# Altium PCB generic 32u4.PcbDoc
Units mil, origin at the board's own origin, x right, y up, seen from the top; angles counter-clockwise.
Board outline 2780 x 3080 mil, 4 copper layers (Component Side, GND LAYER, PWR LAYER, Bottom Layer), stack 64.6 mil thick; 39 components, 27 nets, 136 pads, 43 vias.
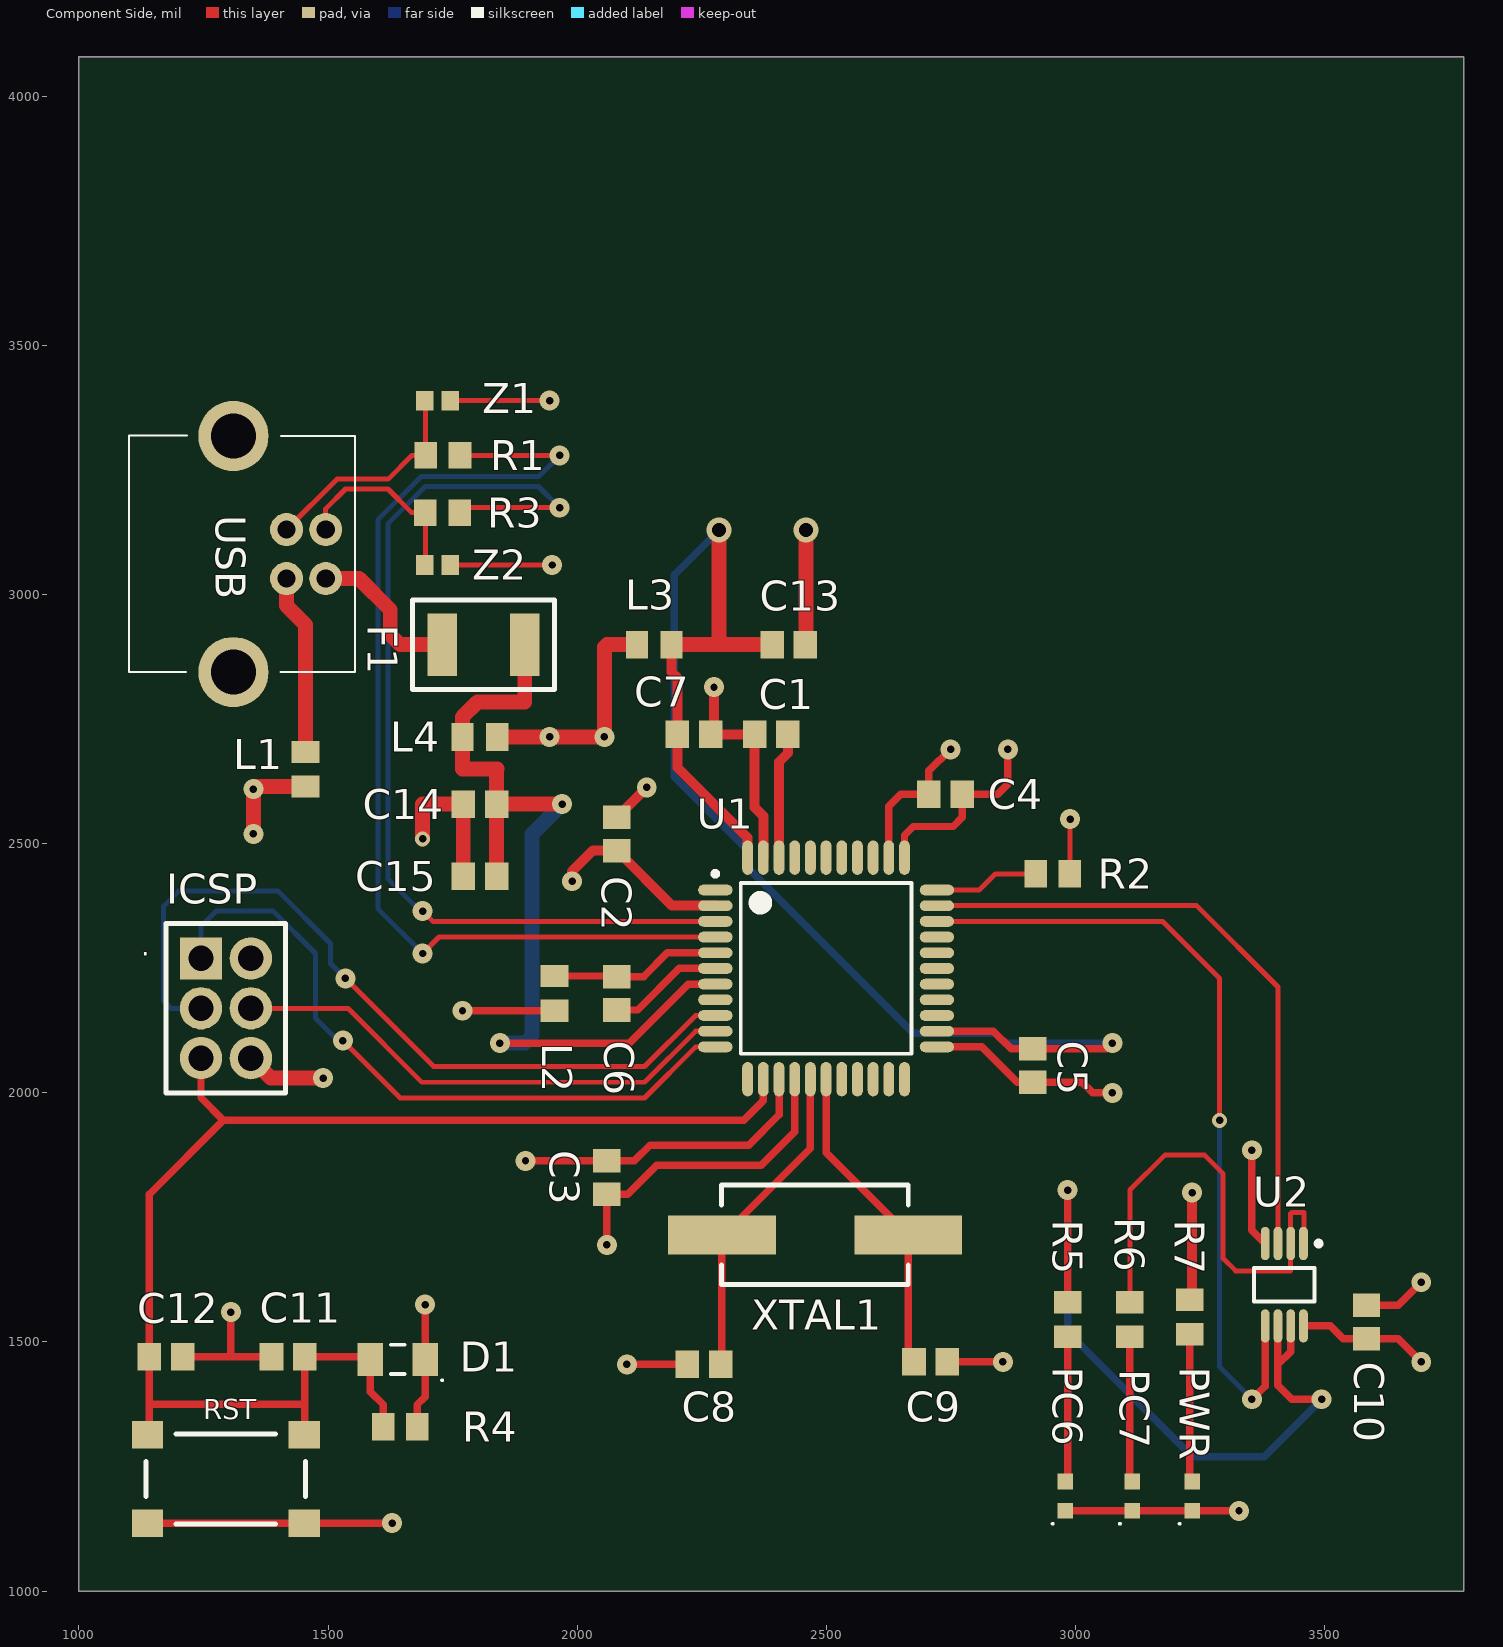
[diagram p0: Component Side view]
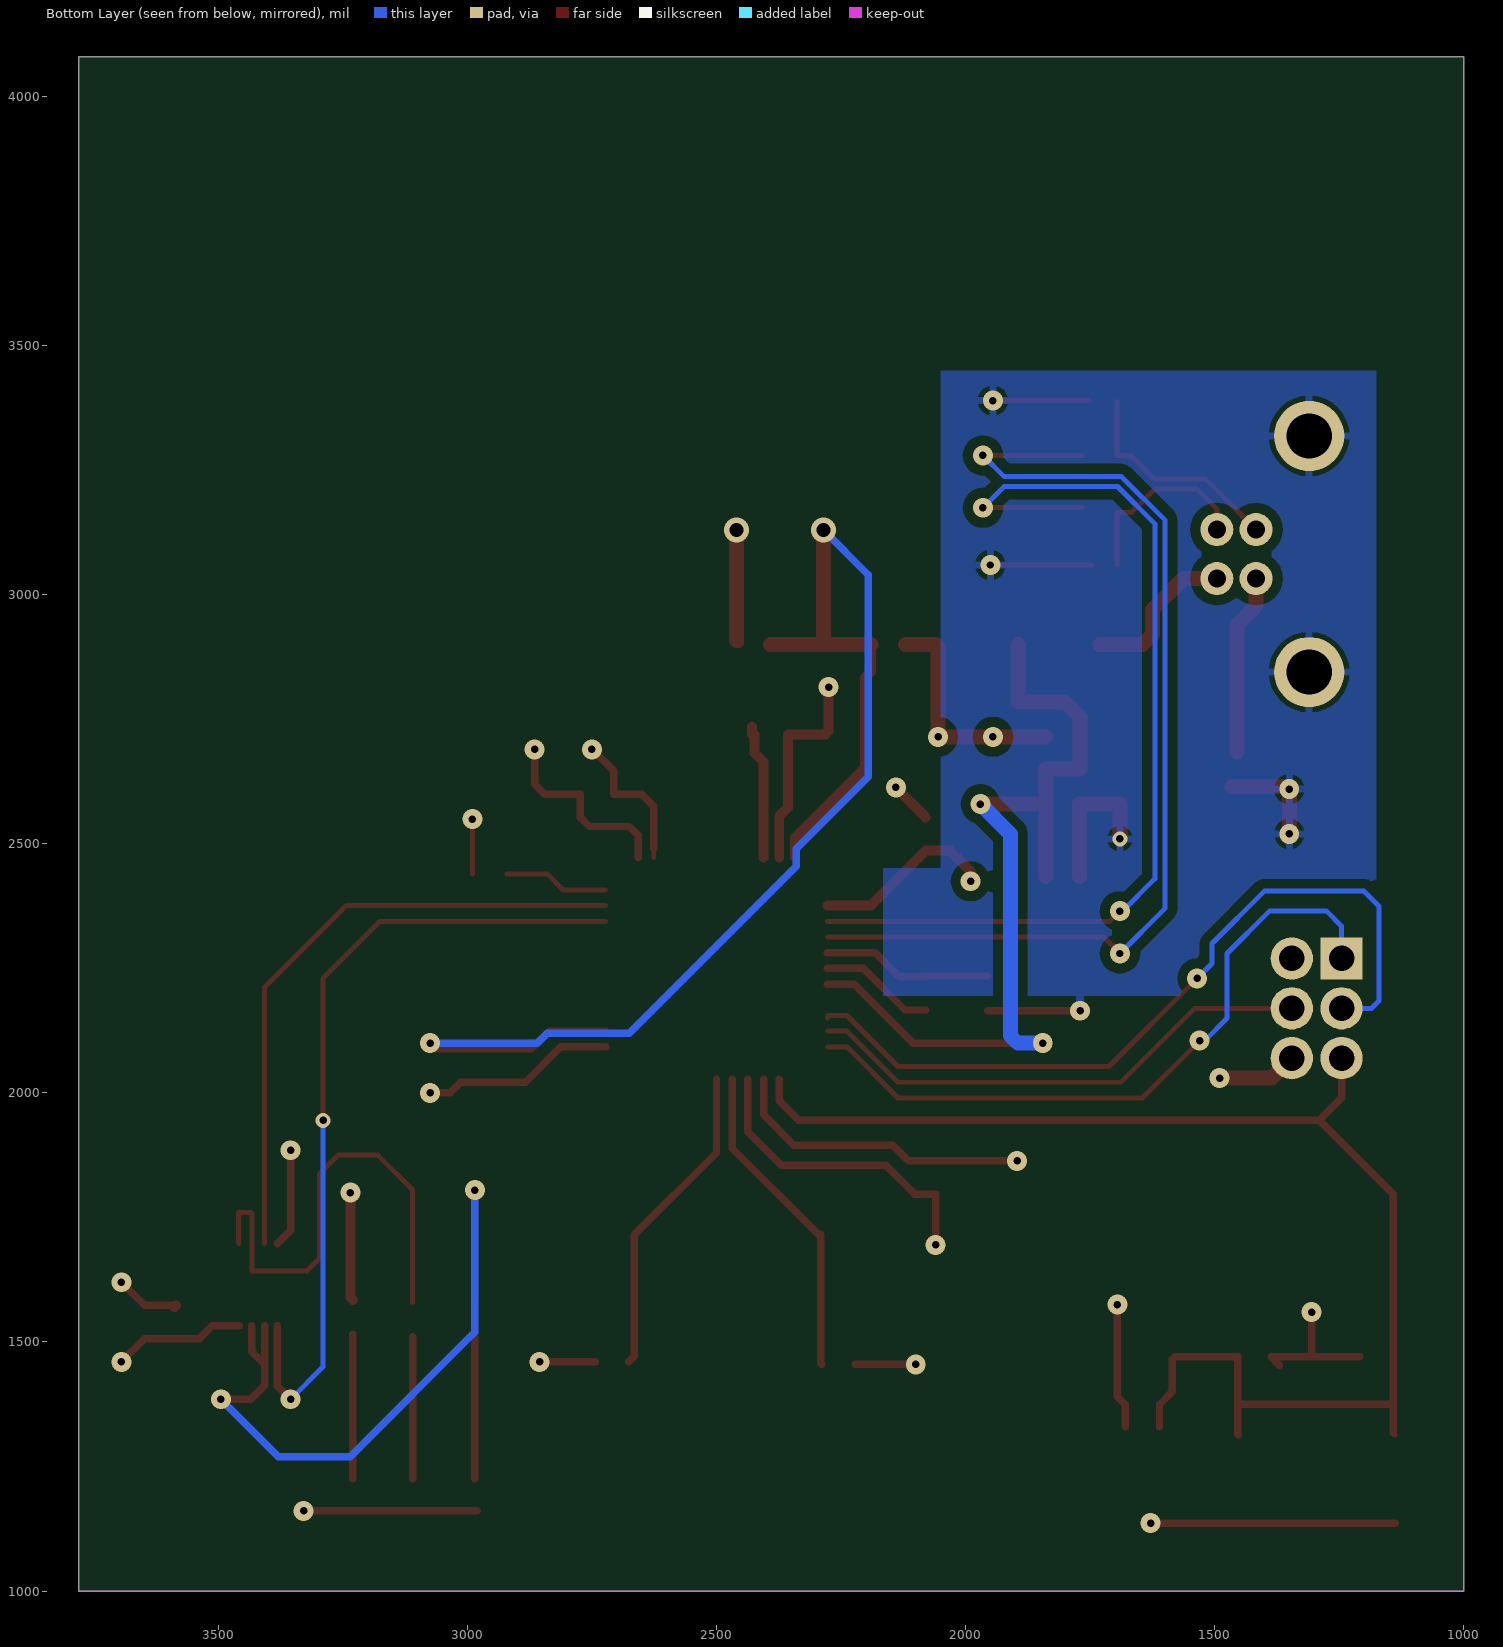
[diagram p1: Bottom Layer view, seen from below]
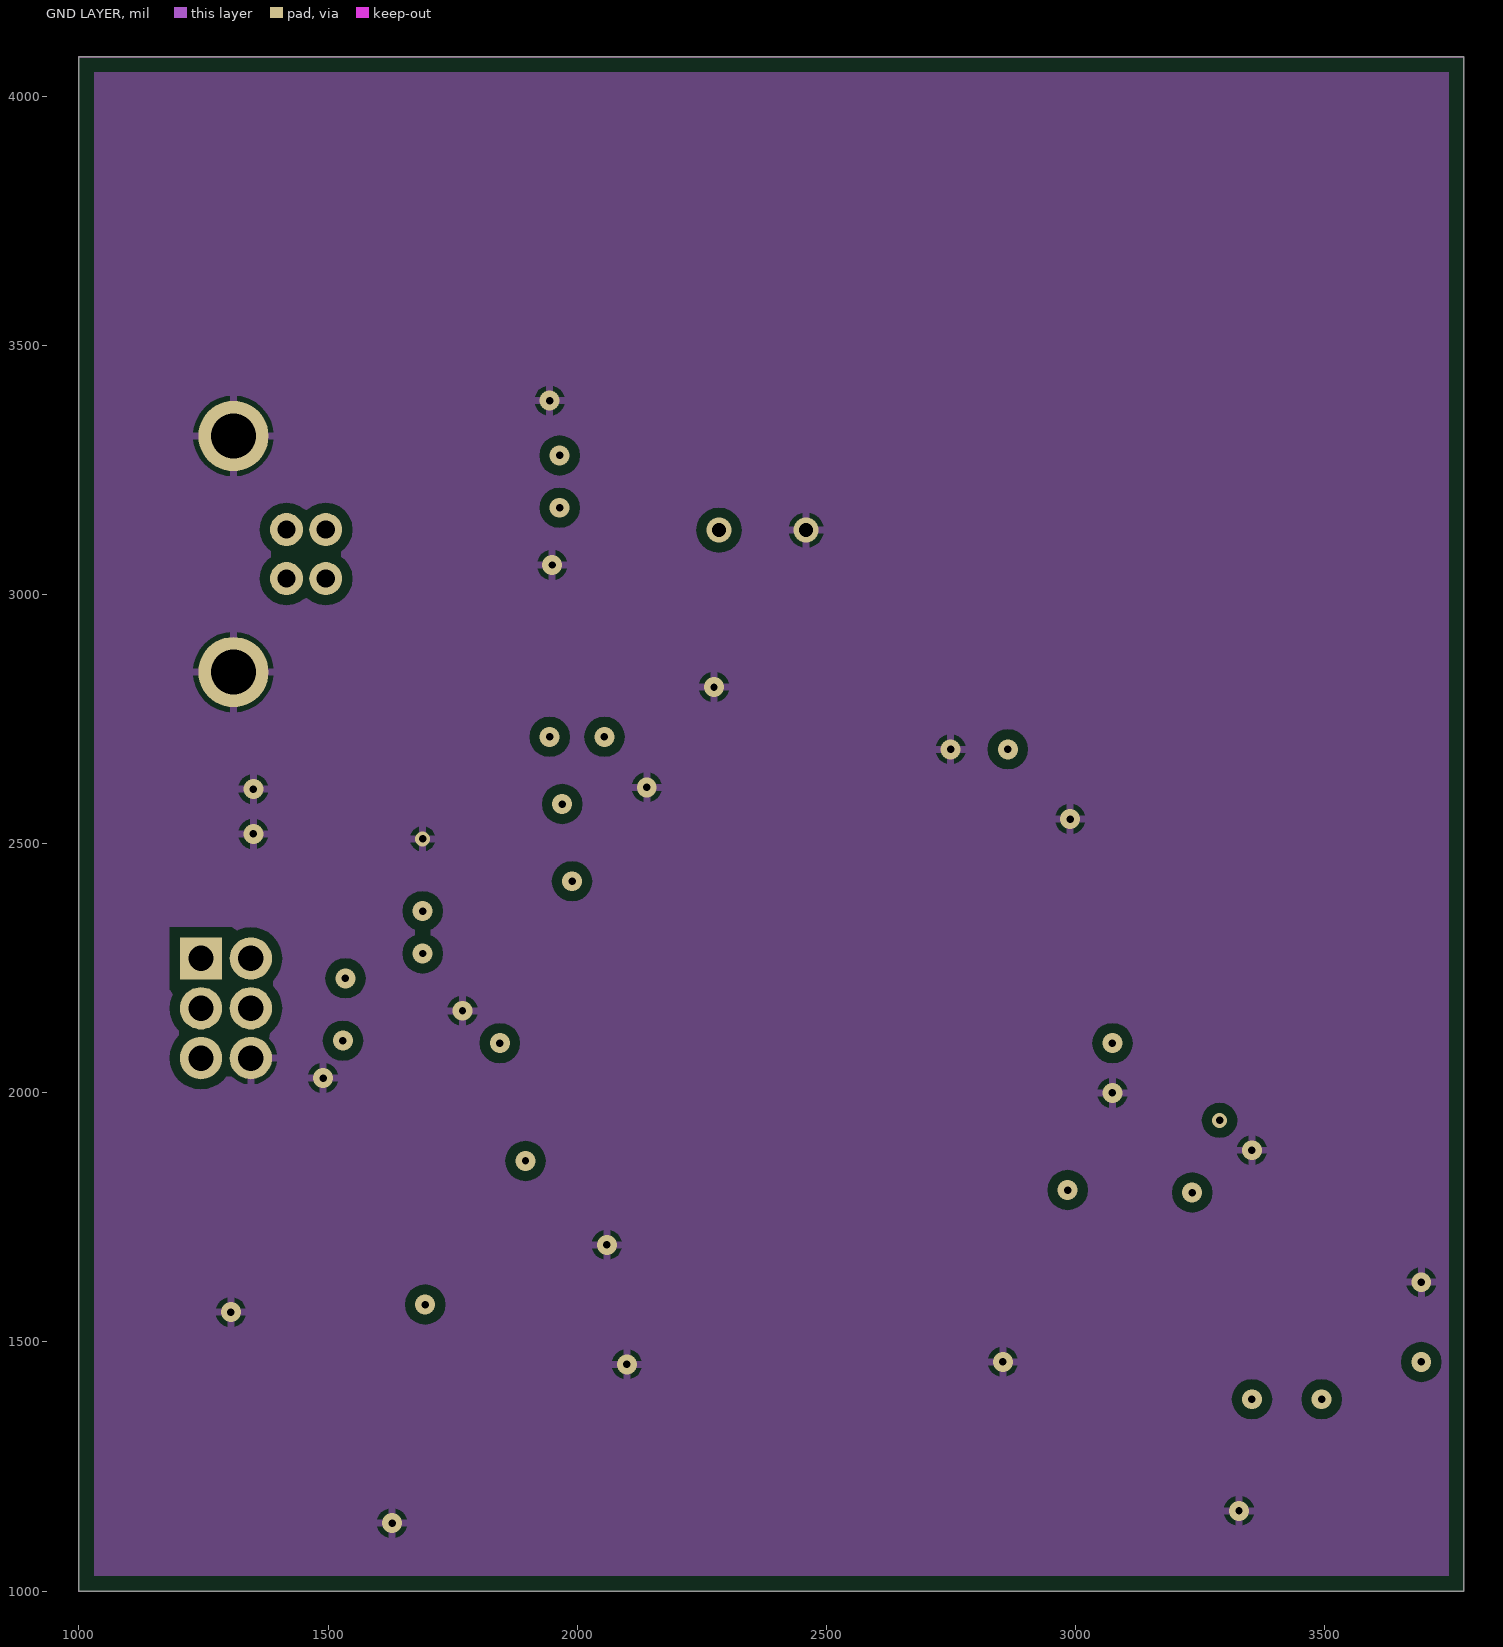
[diagram p2: GND LAYER]
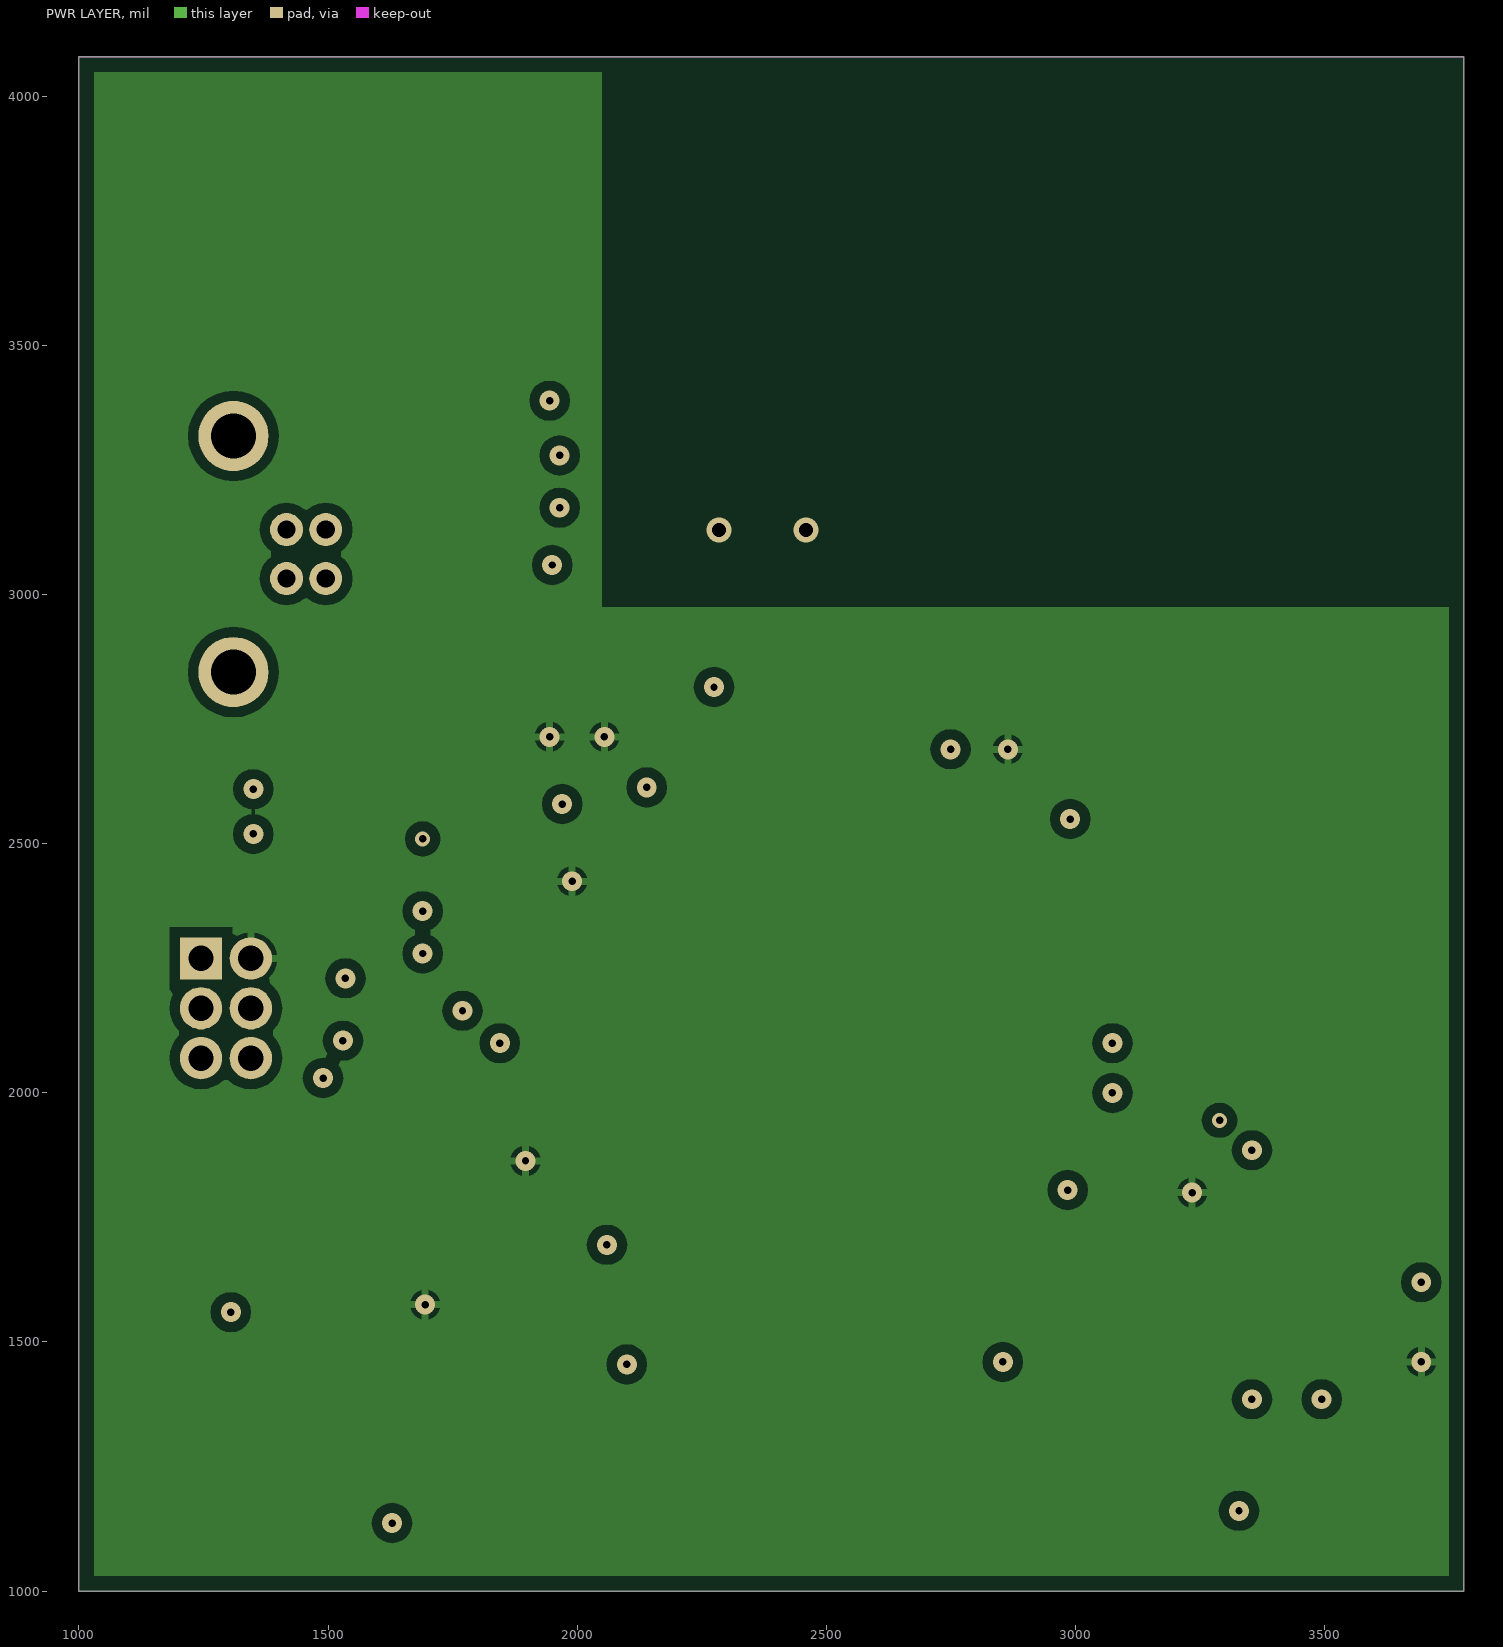
[diagram p3: PWR LAYER]
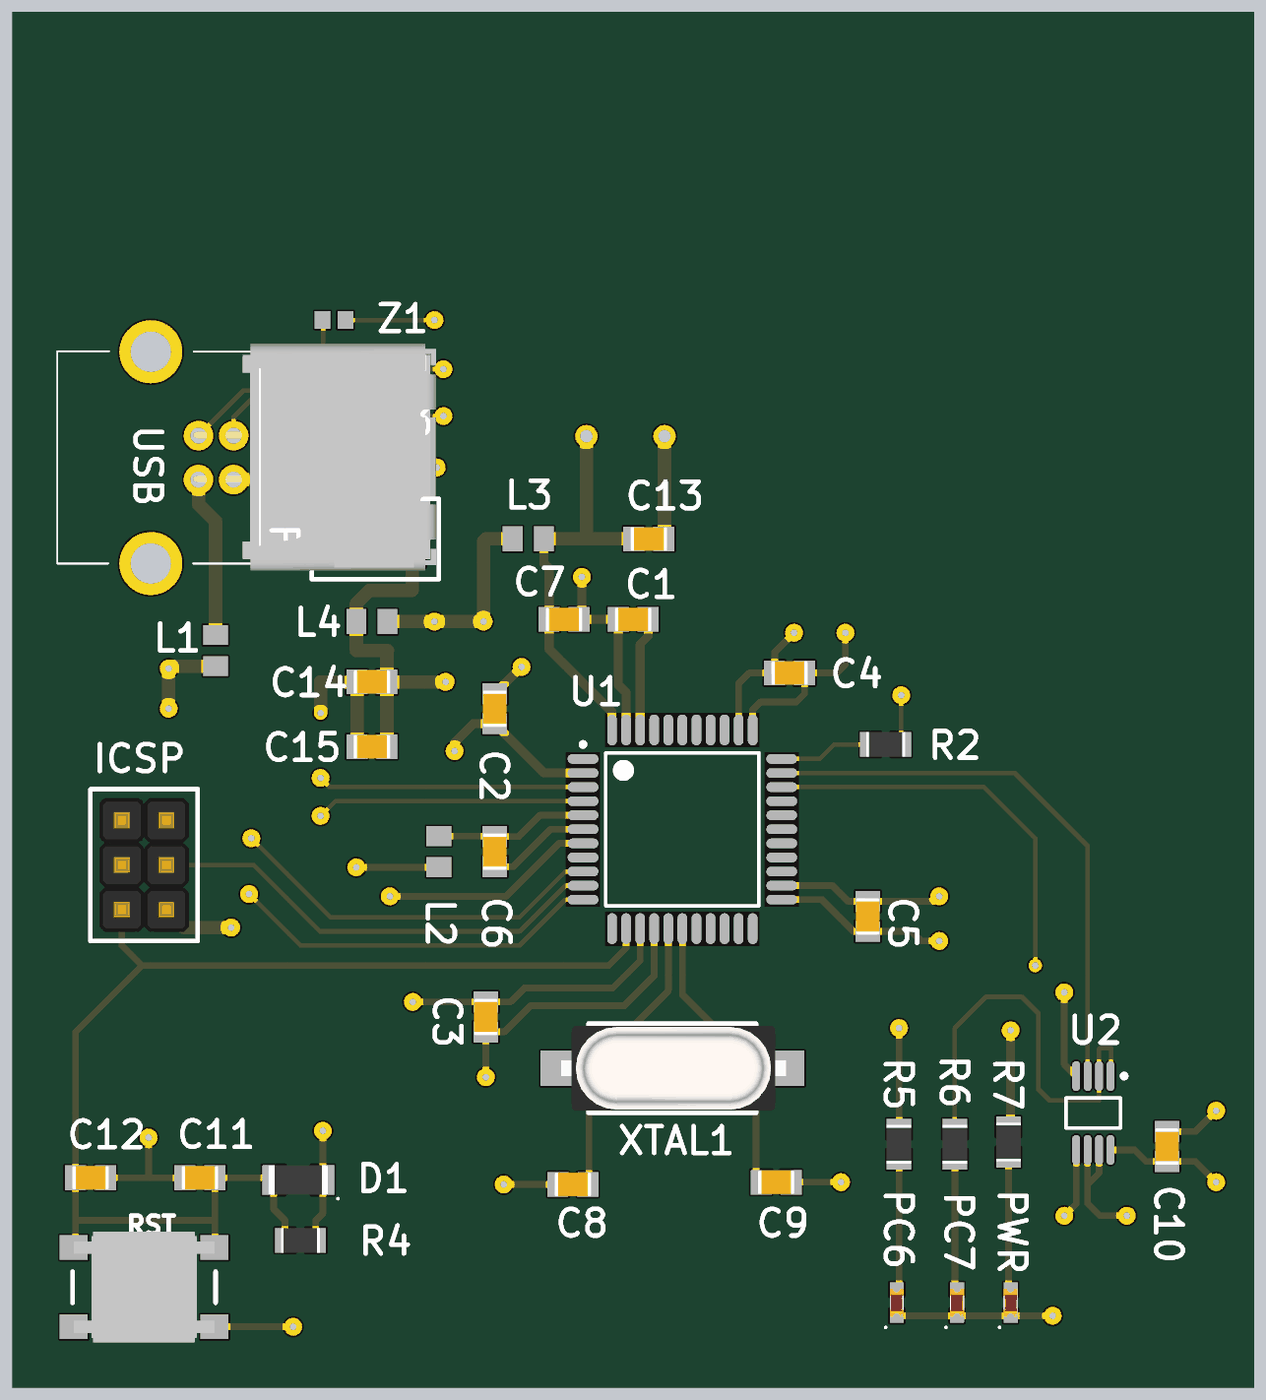
[diagram p4: 3D render of the assembled board from above, using the file's embedded part models]

## Layer stack, top to bottom
Top Solder: solder mask 1, Solder Resist, Dk 3.5
Component Side: signal copper 1.4
Dielectric 1: core 6.7, FR-4, Dk 4.2
GND LAYER: signal copper 0.7
Dielectric 3: prepreg 47, Dk 4.2
PWR LAYER: signal copper 0.7
Dielectric 2: core 6.7, Dk 4.2
Bottom Layer: signal copper 1.4
Solder Side: solder mask 1, Solder Resist, Dk 3.5

## Board outline
1000,1000 3780,1000 3780,4080 1000,4080

## Design rules (kind name [scope] priority, off if disabled: settings)
BoardOutlineClearance [All] p1: gap=30
Clearance [All] p1: gap=6 except(10: SMDPad-Via THPad-Via Via-Via; 20: Arc-Poly Track-Poly SMDPad-Poly THPad-Poly Via-Poly Fill-Poly Poly-Poly)
ComponentClearance [All] p1: gap=50 collisioncheckmode=3 verticalgap=100 showdistances=TRUE
DiffPairsRouting [All] p1: maxlimit=10 minlimit=10 mostfreqgap=10 toplayer_minwidth=8 toplayer_maxwidth=15 toplayer_prefwidth=8 midlayer1_minwidth=10 midlayer1_maxwidth=15 midlayer1_prefwidth=15 midlayer2_minwidth=10 midlayer2_maxwidth=15 midlayer2_prefwidth=15 bottomlayer_minwidth=8 bottomlayer_maxwidth=15 bottomlayer_prefwidth=8 maxuncoupledlength=500
HoleSize [All] p1: absolutevalues=TRUE maxlimit=100 minlimit=13 maxpercent=80.000 minpercent=20.000
MinimumAnnularRing [All] p1: minimumring=7
MinimumSolderMaskSliver [All] p1: minsoldermaskwidth=4
PlaneClearance [All] p1: clearance=30
PlaneConnect [All] p1: planeconnectstyle=Relief reliefexpansion=20 reliefentries=4 reliefconductorwidth=15 reliefairgap=10
PolygonConnect [All] p1: connectstyle=Relief reliefconductorwidth=15 reliefentries=4 polygonreliefangle="90 Angle" airgapwidth=10
RoutingVias [All] p1: holewidth=15 width=30 viastyle="Through Hole" minholewidth=10 minwidth=15 maxholewidth=40 maxwidth=50
SilkToSilkClearance [All] p1: silktosilkclearance=4
SilkToSolderMaskClearance [IsPad] p1: minsilkscreentomaskgap=5 clearancetoexposedcopper=TRUE
SolderMaskExpansion [All] p1: expansion=4
Width [InNetClass('All Nets')] p1: maxlimit=30 minlimit=8 preferedwidth=10 midlayer1_maxwidth=20 midlayer2_maxwidth=20 minimp=50.000000 maximp=50.000000 favimp=50.000000
22 further rules are at their usual default settings.

## Classes and differential pairs
differential pair USBD: +USBD_P -USBD_N
differential pair USB: +USB_P -USB_N

## Components (designator, comment, footprint, x,y, rotation, side; value= is the part's Value field where it differs from the comment)
C1 "100nF" CAPC2012X09N 2390,2720 r0 top
C2 "100nF" CAPC2012X09N 2080,2520 r270 top
C3 "100nF" CAPC2012X09N 2060,1830 r270 top
C4 "100nF" CAPC2012X09N 2740,2600 r180 top
C5 "100nF" CAPC2012X09N 2915,2055 r270 top
C6 "1uF" CAPC2012X14N 2080,2200 r270 top
C7 "100nF" CAPC2012X09N 2235,2720 r0 top
C8 "CAP 18pF" CAPC2012X08N 2255,1455 r0 top
C9 "CAP 18pF" CAPC2012X08N 2710,1460 r180 top
C10 "100nF" CAPC2012X09N 3585,1540 r270 top
C11 "100nF" CAPC2012X09N 1420,1470 r0 top
C12 "100nF" CAPC2012X09N 1175,1470 r180 top
C13 "100nF" CAPC2012X09N 2425,2900 r180 top
C14 "10uF" CAPC2012X14N 1805,2580 r0 top
C15 "100nF" CAPC2012X09N 1805,2435 r0 top
D1 "Diode 100V 150mA" DIOC3215X09N 1640,1465 r0 top
F1 "MF-MSMF050" "FUSE MF-MSMF050" 1895,2900 r180 top
ICSP "67997-206HLF" "3X2 PIN HEADER" 1245,2270 r0 top
L1 "MH2029-300Y" INDC2012X11N 1455,2650 r270 top
L2 "MH2029-300Y" INDC2012X11N 1955,2200 r90 top
L3 "MH2029-300Y" INDC2012X11N 2155,2900 r0 top
L4 "MH2029-300Y" INDC2012X11N 1805,2715 r0 top
PC6 "LED1 - O" 0603LED 2980,1220 r270 top
PC7 "LED-R" 0603LED 3115,1220 r270 top
PWR "PWRLED-G" 0603LED 3235,1220 r270 top
R1 "22R" RESC2012X07N 1730.55,3280 r0 top
R2 "10k" RESC2012X07N_SAMSUNG 2955,2440 r0 top
R3 "22R" RESC2012X07N 1730,3165 r0 top
R4 "10k" RESC2012X07N_SAMSUNG 1645,1330 r0 top
R5 "560R" RESC2012X07N_SAMSUNG 2985,1545 r90 top
R6 "560R" RESC2012X07N_SAMSUNG 3110,1545 r90 top
R7 "560R" RESC2012X07N_SAMSUNG 3230,1550 r90 top
RST "B3FS-1010P" SWITCH 1295,1225 r0 top
U1 "ATmega32U4-AU" 44ML_N 2500,2250 r0 top
U2 "LMV358MMX" MUA08A_N 3420,1615 r270 top
USB "USB" "USB B RECEPTACLE" 1310,2845 r270 top
XTAL1 "9C-16.000MEEJ-T" XTAL 2665,1715 r180 top
Z1 "CG0603MLC" RESC1608X06N 1720,3390 r0 top
Z2 "CG0603MLC" RESC1608X06N 1720,3060 r180 top

## Footprints (in the part's own frame and the unit in brackets; to place one, negate y for a bottom-side part, rotate by r counter-clockwise, add the part's x,y. Pads: shape width x height; smd on the part's side, far side on the other; paste and mask are expansions set on the pad)
"3X2 PIN HEADER" [mil] "0.100\" Pin Header"
  rect 85x85 hole 51.18: 1(0,0)
  round 85 hole 51.18: 2(100,0) 3(0,-100) 4(100,-100) 5(0,-200) 6(100,-200)
  silkscreen extent -70,-270 170,70, body extent -50,-250 150,50, height 318
44ML_N [mm] "Thin QFP, 44-Leads, Body 10x10mm, Pitch 0.8mm, IPC Medium Density"
  oval 1.75x0.55 smd: 1(-5.65,4) 2(-5.65,3.2) 3(-5.65,2.4) 4(-5.65,1.6) 5(-5.65,0.8) 6(-5.65,0) 7(-5.65,-0.8) 8(-5.65,-1.6) 9(-5.65,-2.4) 10(-5.65,-3.2) 11(-5.65,-4) 23(5.65,-4) 24(5.65,-3.2) 25(5.65,-2.4) 26(5.65,-1.6) 27(5.65,-0.8) 28(5.65,0) 29(5.65,0.8) 30(5.65,1.6) 31(5.65,2.4) 32(5.65,3.2) 33(5.65,4)
  oval 0.55x1.75 smd: 12(-4,-5.65) 13(-3.2,-5.65) 14(-2.4,-5.65) 15(-1.6,-5.65) 16(-0.8,-5.65) 17(0,-5.65) 18(0.8,-5.65) 19(1.6,-5.65) 20(2.4,-5.65) 21(3.2,-5.65) 22(4,-5.65) 34(4,5.65) 35(3.2,5.65) 36(2.4,5.65) 37(1.6,5.65) 38(0.8,5.65) 39(0,5.65) 40(-0.8,5.65) 41(-1.6,5.65) 42(-2.4,5.65) 43(-3.2,5.65) 44(-4,5.65)
  silkscreen extent -5.77,-4.35 4.35,4.95, body extent -5,-5 5,5, height 1.2
0603LED [mm] "0603LED"
  rect 0.8x0.8 smd: 1(0,0) 2(1.5,0)
  silkscreen extent 2.11,-0.68 2.21,-0.59, body extent -0.04,-0.4 1.56,0.4, height 0.6
CAPC2012X08N [mm] "Chip Capacitor, 2-Leads, Body 2.00x1.25mm, IPC Medium Density"
  rect 1.2x1.4 smd: 1(-0.85,0) 2(0.85,0)
  body extent -1.05,-0.67 1.05,0.67, height 0.75
CAPC2012X09N [mm] "Chip Capacitor, 2-Leads, Body 2.00x1.25mm, IPC Medium Density"
  rect 1.2x1.4 smd: 1(-0.85,0) 2(0.85,0)
  body extent -1.05,-0.67 1.05,0.67, height 0.95
CAPC2012X14N [mm] "Chip Capacitor, 2-Leads, Body 2.00x1.25mm, IPC Medium Density"
  rect 1.2x1.4 smd: 1(-0.85,0) 2(0.85,0)
  body extent -1.05,-0.67 1.05,0.67, height 1.35
DIOC3215X09N [mm] "Chip Diode, 2-Leads, Body 3.20x1.50mm, IPC Medium Density"
  rect 1.3x1.7 smd: 1(-1.4,0) 2(1.4,0)
  silkscreen extent -0.35,-1.11 2.31,0.75, body extent -1.7,-0.85 1.7,0.85, height 0.95
"FUSE MF-MSMF050" [mm]
  rect 1.5x3.2 smd: 1(0,0) 2(4.2,0)
  silkscreen extent -1.52,-2.29 5.71,2.29, body extent -0.12,-1.62 4.43,1.62, height 0.7
INDC2012X11N [mm] "Chip Inductor, 2-Leads, Body 2.00x1.20mm, IPC Medium Density"
  rect 1.13x1.42 smd: 1(-0.885,0) 2(0.885,0)
  body extent -1.1,-0.7 1.1,0.7, height 1.1
MUA08A_N [mm] "TSOP, 8-Leads, Body 3x3mm, Pitch 0.65mm, IPC Medium Density"
  oval 1.7x0.45 smd: 1(-2.1,0.975) 2(-2.1,0.325) 3(-2.1,-0.325) 4(-2.1,-0.975) 5(2.1,-0.975) 6(2.1,-0.325) 7(2.1,0.325) 8(2.1,0.975)
  silkscreen extent -2.22,-1.55 0.85,1.88, body extent -1.55,-1.55 1.55,1.55, height 1.09
RESC1608X06N [mm] "Chip Resistor, 2-Leads, Body 1.60x0.80mm, IPC Medium Density"
  rect 0.9x1 smd: 1(-0.65,0) 2(0.65,0)
  body extent -0.9,-0.5 0.9,0.5, height 0.55
RESC2012X07N [mm] "Chip Resistor, 2-Leads, Body 2.00x1.25mm, IPC Medium Density"
  rect 1.15x1.35 smd: 1(-0.875,0) 2(0.875,0)
  body extent -1.1,-0.67 1.1,0.67, height 0.7
RESC2012X07N_SAMSUNG [mm] "Chip Resistor, 2-Leads, Body 2.00x1.25mm, IPC Medium Density"
  rect 1.15x1.4 smd: 1(-0.875,0) 2(0.875,0)
  body extent -1.1,-0.7 1.1,0.7, height 0.65
SWITCH [mm] "SWITCH"
  rect 1.6x1.4 smd: 1(4,-2.25) 2(-4,-2.25) 3(4,2.25) 4(-4,2.25)
  silkscreen extent -4.06,-2.29 4.06,2.29, body extent -4,-3.15 4,3.15, height 4.3
"USB B RECEPTACLE" [mm] "Amphenol 61729-1011BLF"
  round 1.682 hole 0.92: +5VBus(-4.77,4.71) USBDM(-7.27,4.71) USBDP(-7.27,2.71) USBGND(-4.77,2.71)
  round 3.581 hole 2.3: SHL_GND1(-12.04,0) SHL_GND2(0,0)
  silkscreen extent -12.06,-5.32 0,6.19, body extent -12.61,-10.13 0.51,5.81, height 11
XTAL [mm]
  rect 5.5x2 smd: 1(0,0) 2(9.5,0)
  silkscreen extent 0,-2.54 9.53,2.54, body extent -1.7,-2.41 11.1,2.42, height 4.3

## Part data
C1 C2 C3 C4 C5 C7 C10 C11 C12 C13 C15: library part CL21F104ZBCNNNC, "CAP CER 0.1UF 50V Y5V 0805"
C6: library part CL21A105KBCLNNC, "CAP CER 1UF 50V X5R 0805"
C8 C9: library part CL21C180JBANNNC, "CAP CER 18PF 50V NP0 0805"
C14: library part CL21A106KAYNNNE, "CAP CER 10UF 25V X5R 0805"
D1: library part CD1206-S01575, "DIODE GEN PURP 100V 150MA 1206"
F1: library part MF-MSMF050-2, "PTC RESETTABLE .50A 15V 1812"
ICSP: "CONN HEADER 6POS .100 STR 15AU"
L1 L2 L3 L4: "EMI Filter Beads, Chips & Arrays Impedance 30ohms IDC 3.0"
PC6: library part "LO L29K-J2L1-24-Z", "LED ORANGE DIFFUSED 0603 SMD"
PC7: library part "LS L29K-H1J2-1-Z", "LED RED DIFFUSED 0603 SMD"
PWR: library part "LG L29K-F2J1-24", "LED GREEN DIFFUSED 0603 SMD"
R1 R3: library part ERJ-6ENF22R0V, "RES SMD 22 OHM 1% 1/8W 0805"
R2 R4: library part RC2012F103CS, "RES SMD 10K OHM 1% 1/8W 0805"
R5 R6 R7: library part RC2012F561CS, "RES SMD 560 OHM 1% 1/8W 0805"
RST: "SWITCH TACTILE SPST-NO 0.05A 24V"
U1: library part CMP-0095-00285-2, "8-bit AVR Microcontroller, 2.7-5.5V, 16MHz, 32KB Flash, 1KB EEPROM, 2.5KB SRAM, USB Controller, 44-pin TQFP, Industrial Grade (-40°C to 85°C), Ext Osc"
U2: library part CMP-0055-01464-2, "General Purpose, Low Voltage, Rail-to-Rail Output Operational Amplifiers, 8-pin Mini SOIC"
USB: library part 61729-1011BLF, "USB RCPT B-TYPE R/A FULL BACK"
XTAL1: "CRYSTAL 16.0000MHZ 18PF SMD"
Z1 Z2: library part CG0603MLC-05E, "VARISTOR 0603"

## Via types
v1: diameter 40, hole 15, Component Side to Bottom Layer, 39 vias
v2: diameter 50, hole 28, Component Side to Bottom Layer, 2 vias
v3: diameter 30, hole 15, Component Side to Bottom Layer, 2 vias

## Nets (pads, with @x,y where several pads share a name; then routed paths per layer and width w, separated by ;. In a path a pad name is that pad's centre, name@x,y a point inside that pad or via, vN(x,y) a via of type N, cw(c..) or ccw(c..) an arc to the next point about the centre after c; other vN are vias at no path point)
+5V: C2.2 C3.1 C4.1 C10.2 D1.2 ICSP.2 L3.1 L4.2 R4.2 R7.2 U1.2 U1.14 U1.34 U2.8 | length 2584.8
  Component Side w15: R4.2 1679.45,1374.45 1695.12,1390.12 D1.2 v1(1695.12,1575.12) v1@1700,1575.12 ; v1(1896.54,1863.46) C3.1 2115,1863.46 2146.54,1895 2344.54,1895 2405.51,1955.97 U1.14 ; U1.34 2657.48,2517.48 2675,2535 2755,2535 2773.46,2553.46 C4.1 2845,2600 2865,2620 v1(2865,2690) ; U2.8 3512.68,1532.32 3538.46,1506.54 C10.2 3648.46,1506.54 v1(3695,1460)
  Component Side w20: v1(1990,2425) 1990,2445 2031.54,2486.54 C2.2 2190.55,2375.98 U1.2 ; R7.2 3235,1589.45 v1(3235,1800)
  Component Side w30: L4.2 v1(2055,2715) 2055,2895 2060,2900 L3.1
  other v1: 1945,2715
AVCC: C5.1 C7.1 C13.2 L3.2 U1.24 U1.44 | length 2948.9
  Component Side w15: U1.24 2835.98,2124.02 2871.54,2088.46 C5.1 3063.46,2088.46 v1(3075,2100)
  Component Side w20: L3.2 2189.84,2845.16 2201.54,2833.46 C7.1 2201.54,2653.46 2342.52,2512.48 U1.44
  Component Side w30: L3.2 2285,2900 ; v2(2285,3130) 2285,2900 ; C13.2 2285,2900
  Bottom Layer w15: v2(2285,3130) 2195,3040 2195,2635 2340,2490 2340,2455 2675,2120 2840,2120 2860,2100 v1(3075,2100)
GND: C1.1 C2.1 C3.2 C4.2 C5.2 C7.2 C8.1 C9.1 C10.1 C11.1 C12.1 C13.1 C14.1 C15.1 ICSP.6 L1.2 L2.1 PC6.2 PC7.2 PWR.2 R2.2 RST.1 RST.2 U1.15 U1.23 U1.35 U1.43 U2.4 USB.SHL_GND1 USB.SHL_GND2 Z1.2 Z2.1 | length 5120.1
  Component Side w10: Z2.1 v1(1950,3060) ; Z1.2@1751.14,3390 v1(1945,3390) ; U1.35 U1.35@2625.98,2490 ; R2.2 v1@2989.45,2549.45
  Component Side w15: RST.2 RST.1 v1(1628.58,1136.42) ; C12.1 C11.1 C11.1@1370,1453.46 ; 1305,1475 v1(1305,1560) ; v1(1770,2165) 1954.84,2165 L2.1 ; v1(2060,1695) C3.2 2101.54,1796.54 2160,1855 2370,1855 2437.01,1922.01 U1.15 ; v1(2100,1455) C8.1 ; U1.35@2625.98,2490 2625.98,2575.98 2650,2600 C4.2 2706.54,2646.54 v1(2750,2690) ; U1.23 2812.48,2092.52 2883.46,2021.54 C5.2 3013.46,2021.54 3035,2000 v1(3075,2000) ; C9.1 v1(2855,1460) ; PC6.2 PC7.2 PWR.2 v1(3329.06,1160.94) ; v1(3355,1885) 3355,1724.29 U2.4 ; C10.1 3648.46,1573.46 v1(3695,1620)
  Component Side w20: C2.1 v1(2140,2613.46) ; v1(2275,2815) 2275,2726.54 2281.54,2720 C1.1 2356.54,2573.46 2374.02,2555.98 U1.43 ; C13.1@2455,2903.46 C13.1@2460,2908.46 ; C10.1 C10.1@3588.46,1570
  Component Side w30: ICSP.6 1385,2030 v1(1490,2030) ; v1(1350,2520) v1(1350,2610) 1355.16,2615.16 L1.2@1465,2615.16 ; v3(1690,2510) 1690,2580 C14.1 C15.1 ; C13.1@2460,2908.46 v2(2460,3130)
  other v1: 2990,2550
NetC1_2: C1.2 U1.42 | length 270
  Component Side w20: U1.42 2405.51,2664.49 2423.46,2682.44 C1.2 ; C1.2@2428.46,2720 C1.2@2428.46,2735
NetC6_1: C6.1 L2.2 U1.5 | length 341.1
  Component Side w15: L2.2 C6.1@2078.62,2234.84 ; C6.1 2133.46,2233.46 2181.5,2281.5 U1.5
NetC6_2: C6.2 U1.6 | length 232.1
  Component Side w15: C6.2 2121.54,2166.54 2205,2250 U1.6
NetC8_2: C8.2 U1.16 XTAL1.2 | length 649.5
  Component Side w15: C8.2 2290.98,1457.52 XTAL1.2 2295,1715 2468.5,1888.5 U1.16
NetC9_2: C9.2 U1.17 XTAL1.1 | length 640.7
  Component Side w15: U1.17 2500,1880 XTAL1.1 2665,1471.54 C9.2
NetC11_2: C11.2 C12.2 D1.1 ICSP.5 R4.1 RST.3 RST.4 U1.13 | length 2722.3
  Component Side w10: RST.4 RST.4@1141.54,1317.6
  Component Side w15: RST.4@1141.54,1317.6 1141.54,1375 ; ICSP.5 1245,1990 1290,1945 ; RST.3 RST.3@1452.48,1314.57 ; RST.3@1453.46,1314.57 1453.46,1375 ; D1.1@1579.88,1470 C11.2 1453.46,1375 ; D1.1 1584.88,1400.12 1610.55,1374.45 R4.1 ; U1.13 2374.02,1984.02 2335,1945 1290,1945 ; 1141.54,1375 C12.2 1141.54,1796.54 1290,1945 ; 1141.54,1375 1453.46,1375
NetF1_2: F1.2 USB.+5VBus | length 318.5
  Component Side w30: USB.+5VBus 1562.2,3032.8 1625,2970 1625,2920 1645,2900 F1.2
NetICSP_1: ICSP.1 U1.11 | length 1383.9
  Component Side w10: v1(1530,2105) 1645,1990 2135.59,1990 2238.11,2092.52 U1.11
  Bottom Layer w10: ICSP.1 1245,2335 1275,2365 1390,2365 1475,2280 1475,2150 1520,2105 v1(1530,2105)
NetICSP_3: ICSP.3 U1.9 | length 1608
  Component Side w10: v1(1535,2230) 1712.01,2052.99 2135.59,2052.99 2238.11,2155.51 U1.9 U1.9@2277.56,2150.4
  Bottom Layer w10: ICSP.3 1185,2170 1170,2185 1170,2375 1200,2405 1400,2405 1505,2300 1505,2260 v1(1535,2230)
NetICSP_4: ICSP.4 U1.10 | length 1036.5
  Component Side w10: ICSP.4 1540,2170 1688.5,2021.5 2135.59,2021.5 2238.11,2124.02 U1.10
NetL1_1: L1.1 USB.USBGND | length 363.8
  Component Side w30: USB.USBGND 1416.69,2978.31 1455,2940 L1.1
NetPC6_1: PC6.1 R5.1 | length 285.6
  Component Side w15: PC6.1@2985,1225 R5.1
NetPC7_1: PC7.1 R6.1 | length 285.6
  Component Side w15: PC7.1@3110,1225 R6.1
NetPWR_1: PWR.1 R7.1 | length 290.6
  Component Side w15: PWR.1@3230,1225 R7.1
NetR2_1: R2.1 U1.33 | length 211.6
  Component Side w10: U1.33 2807.48,2407.48 2840,2440 R2.1
NetR5_2: R5.2 U2.6 U2.7 | length 1478.5
  Component Side w15: R5.2 v1(2985,1805) ; U2.6 3407.2,1455 ; U2.7 3432.8,1480.59 3407.2,1455 ; v1(3495,1385) 3435,1385 3407.2,1412.8 3407.2,1455
  Bottom Layer w15: v1(2985,1805) 2985,1520 3235,1270 3380,1270 v1(3495,1385)
NetR6_2: R6.2 U2.1 U2.2 | length 979.2
  Component Side w10: R6.2 3110,1805 3180,1875 3260,1875 3297.2,1837.8 3297.2,1667.8 3322.2,1642.8 3432.8,1642.8 U2.2 3432.8,1757.8 3435,1760 3460,1760 3460,1699.29 U2.1
NetU1_31: U1.31 U2.5 | length 1645.3
  Component Side w10: U1.31 3175.51,2344.49 3290,2230 v3(3290,1945)
  Component Side w15: v1(3355,1385) 3381.61,1411.61 U2.5
  Bottom Layer w10: v3(3290,1945) 3290,1450 v1(3355,1385)
NetU1_32: U1.32 U2.3 | length 1267.5
  Component Side w10: U1.32 3244.02,2375.98 3407.2,2212.8 U2.3
USB_N: R3.1 USB.USBDM Z2.2 | length 381.8
  Component Side w10: USB.USBDM 1495.43,3172.93 1535,3212.5 1620.41,3212.5 1667.91,3165 R3.1 Z2.2@1695.55,3061.14
USB_P: R1.1 USB.USBDP Z1.1 | length 449.3
  Component Side w10: USB.USBDP 1517.97,3232.5 1535,3232.5 1620.96,3232.5 1668.46,3280 R1.1 Z1.1@1696.1,3388.31
USBD_N: R3.2 U1.3 | length 1999.1
  Component Side w10: v1(1690,2365) 1710.51,2344.49 U1.3 ; R3.2@1765,3175 v1(1965,3175)
  Bottom Layer w10: v1(1690,2365) 1685,2365 1620,2430 1620,3142.5 1695,3217.5 1922.5,3217.5 v1(1965,3175)
USBD_P: R1.2 U1.4 | length 2127.8
  Component Side w10: v1(1690,2280) 1722.99,2312.99 U1.4 ; R1.2 v1(1965,3280)
  Bottom Layer w10: v1(1690,2280) 1600,2370 1600,3150.78 1686.72,3237.5 1922.5,3237.5 v1(1965,3280)
VUSB: C14.2 C15.2 F1.1 L4.1 U1.7 | length 1816.9
  Component Side w15: v1(1845,2100) 2105,2100 2223.5,2218.5 U1.7
  Component Side w30: C15.2 C14.2 ; F1.1 1895,2785 1800,2785 1770.16,2755.16 L4.1 1770.16,2650.16 1839.84,2650.16 1838.46,2648.78 C14.2 ; v1(1970,2580) C14.2
  Bottom Layer w30: v1(1845,2100) 1895,2100 1910,2115 1910,2520 v1(1970,2580)
pads on no net: U1.1 U1.8 U1.12 U1.18 U1.19 U1.20 U1.21 U1.22 U1.25 U1.26 U1.27 U1.28 U1.29 U1.30 U1.36 U1.37 U1.38 U1.39 U1.40 U1.41

## Polygon pours and split planes (outlines as drawn)
+5V on PWR LAYER "+5V" (solid, pour order 4): 1000,1000 1000,4080 2050,4080 2050,2975 2895,2975 3775,2975 3775,1000
GND on GND LAYER "GND LAYER" (solid, pour order 0): 1000,1000 1000,4080 4530,4080 4530,1000
GND on Bottom Layer "GND" (solid, remove dead copper, pour order 20): 1175,2195 1175,3450 2049.57,3450 2049.57,2451.54 2165,2451.54 2165,2195

## Keep-outs
Keep-Out Layer:
  lines w1: 1000,1000 3780,1000 3780,1145 3780,4080 1000,4080 1000,1000